# Altium PCB microb.pcbdoc
Units mm, origin at the board's own origin, x right, y up, seen from the top; angles counter-clockwise.
Board outline 34.1 x 33.11 mm, 2 copper layers (Top Layer, Bottom Layer); 1 components, 0 nets, 9 pads, 0 vias.
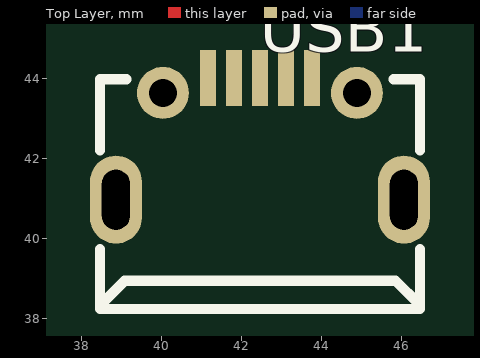
[diagram p0: Top Layer view]
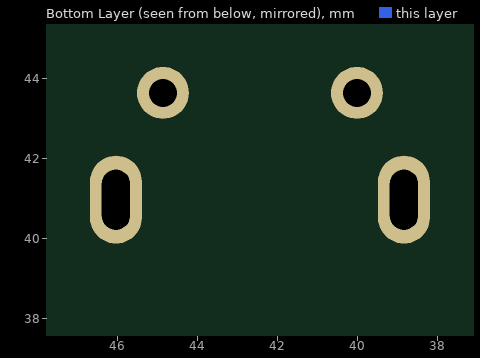
[diagram p1: Bottom Layer view, seen from below]

## Layer stack, top to bottom
Top Layer: signal copper (thickness not stored)
Dielectric: dielectric 0.32, FR-4, Dk 4.8
Bottom Layer: signal copper (thickness not stored)

## Board outline
59.5,25.4 25.4,25.4 25.4,58.508 59.5,58.508

## Components (designator, comment, footprint, x,y, rotation, side; value= is the part's Value field where it differs from the comment)
USB1 "MICRO-USB-SMD_MICROXNJ" MICRO-USB-SMD_MICROXNJ 42.45,42.486 r0 top

## Footprints (in the part's own frame and the unit in brackets; to place one, negate y for a bottom-side part, rotate by r counter-clockwise, add the part's x,y. Pads: shape width x height; smd on the part's side, far side on the other; paste and mask are expansions set on the pad)
MICRO-USB-SMD_MICROXNJ [mm]
  rect 0.4x1.4 smd: 1(-1.3,1.521) 2(-0.65,1.521) 3(0,1.521) 4(0.65,1.521) 5(1.3,1.521)
  round 1.3 hole 0.7: 6(2.425,1.149) 9(-2.425,1.149)
  oval 1.3x2.2 hole 0.7 slot 1.5 at 90 deg: 7(3.6,-1.521) 8(-3.6,-1.521)
  silkscreen extent -4,-4.26 4,1.49

## Nets (pads, with @x,y where several pads share a name; then routed paths per layer and width w, separated by ;. In a path a pad name is that pad's centre, name@x,y a point inside that pad or via, vN(x,y) a via of type N, cw(c..) or ccw(c..) an arc to the next point about the centre after c; other vN are vias at no path point)
pads on no net: USB1.1 USB1.2 USB1.3 USB1.4 USB1.5 USB1.6 USB1.7 USB1.8 USB1.9